# EAGLE board top (EAGLE 7.6.0)
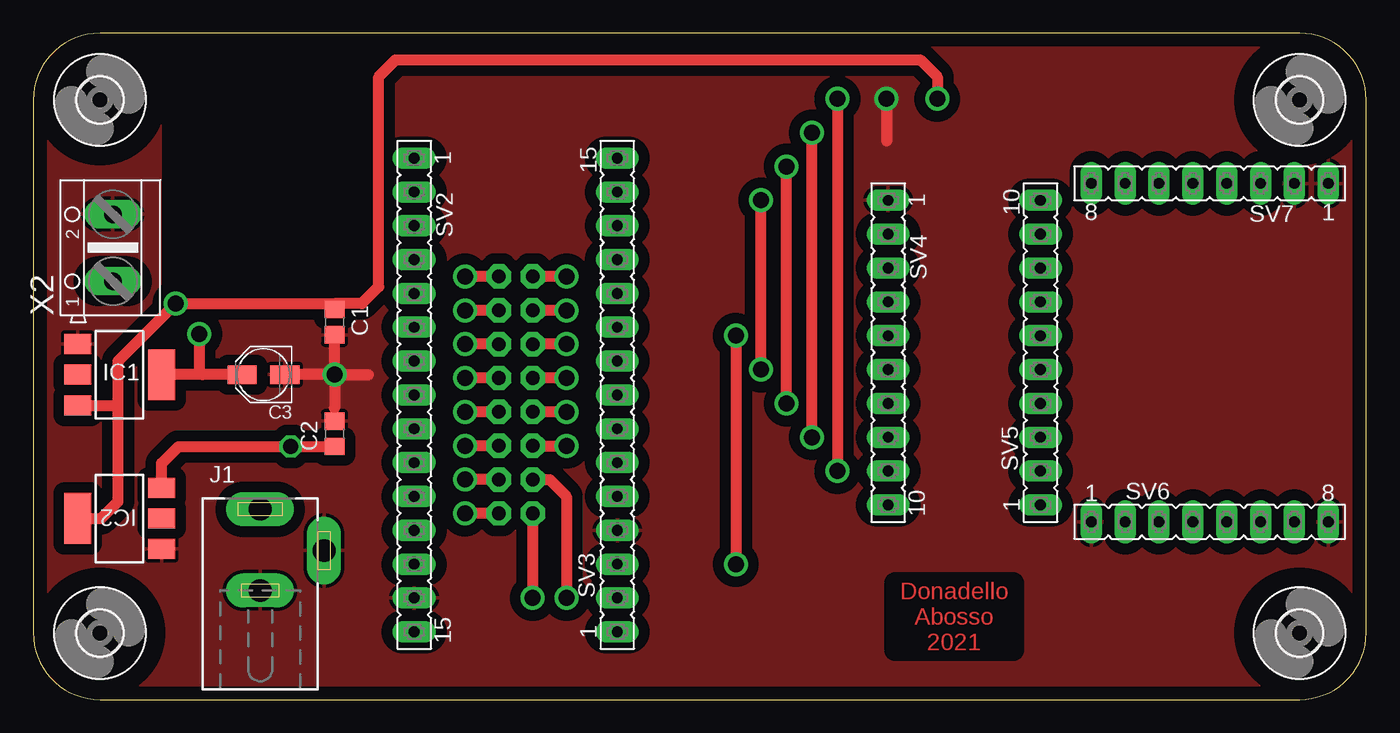
[diagram p0: board, top side]
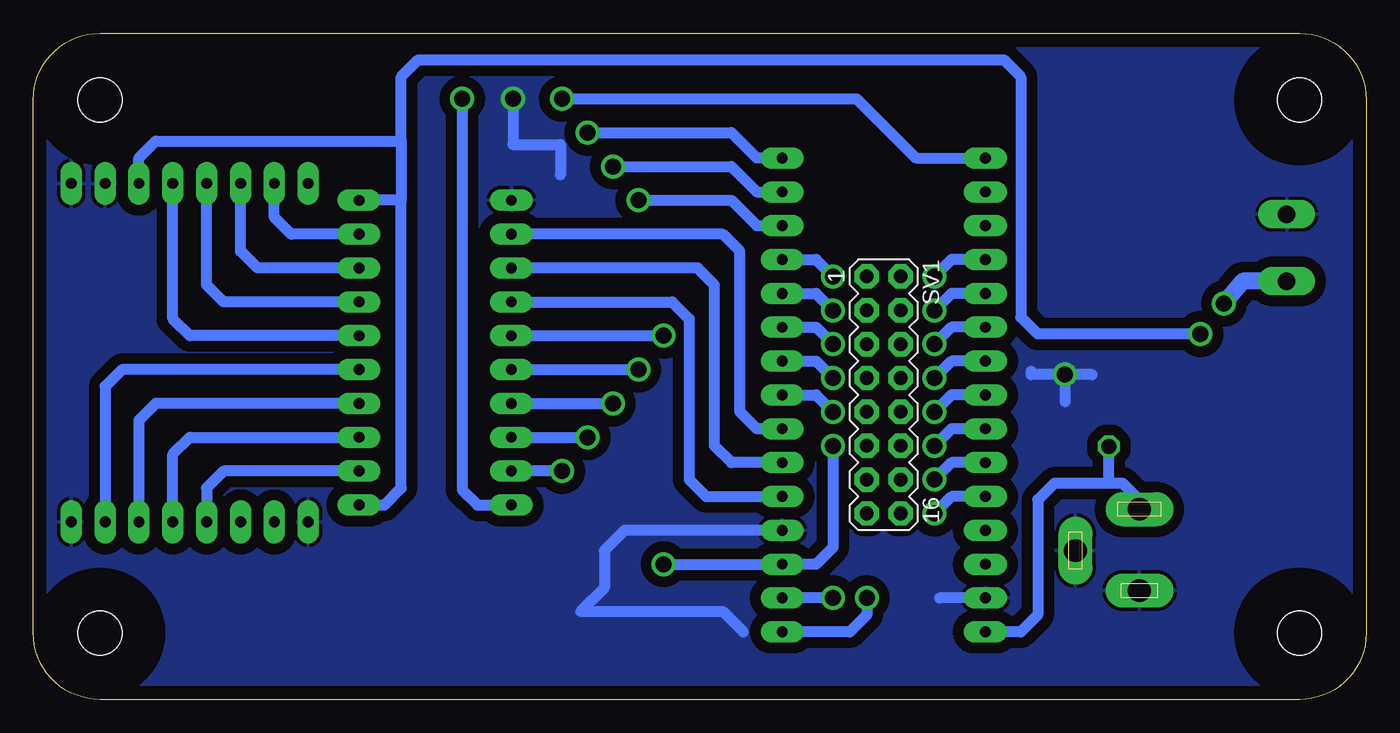
[diagram p1: board, bottom side, seen from below]

Size 100 x 50 mm. Coordinates in mm from the lower left corner, seen from the top.
Outline: 0,45 0,5 arc90 5,0 95,0 arc90 100,5 100,45 arc90 95,50 5,50 arc90 0,45
Copper layers (1*16): Top 0.035mm / dielectric 1.5mm / Bottom 0.035mm
Design rules "default *": minimum track width 6mil, minimum drill 0.35mm, track to track 6mil, track to pad 6mil, pad to pad 6mil, via to via 6mil, smd to smd 6mil, copper to edge 40mil, drill to drill 6mil, minimum pad ring 16mil, minimum via ring 8mil, stop-mask expansion 4mil, vias tented up to drill 0mil, thermal gap 10mil
Net classes: 0 default: width 0.203 mm; 1 vcc: width 0.254 mm

## Footprints (pad centres in the part's own frame; a part is rotated, then mirrored left to right if it is on the bottom)
C0805 = smd 1.3 x 1.5: 1 -0.95,0; 2 0.95,0
PANASONIC_B = smd 2.2 x 1.4: + 1.6,0; - -1.6,0
SOT223 = smd 1.5 x 2: 1 -2.3,-3.15; 2 0,-3.15; 3 2.3,-3.15 | smd 3.8 x 2: 4 0,3.15
DCJ0202 = drill 1.7 pad 2.54 long: 1 0,3.1; 2 4.8,0; 3 0,-3
MA08-2 = drill 1.016 octagon: 1 -8.89,-1.27; 2 -8.89,1.27; 3 -6.35,-1.27; 4 -6.35,1.27; 5 -3.81,-1.27; 6 -3.81,1.27; 7 -1.27,-1.27; 8 -1.27,1.27; 9 1.27,-1.27; 10 1.27,1.27; 11 3.81,-1.27; 12 3.81,1.27; 13 6.35,-1.27; 14 6.35,1.27; 15 8.89,-1.27; 16 8.89,1.27
FE15 = drill 0.813 long: 1 -17.78,0; 2 -15.24,0; 3 -12.7,0; 4 -10.16,0; 5 -7.62,0; 6 -5.08,0; 7 -2.54,0; 8 0,0; 9 2.54,0; 10 5.08,0; 11 7.62,0; 12 10.16,0; 13 12.7,0; 14 15.24,0; 15 17.78,0
FE10 = drill 0.813 long: 1 -11.43,0; 2 -8.89,0; 3 -6.35,0; 4 -3.81,0; 5 -1.27,0; 6 1.27,0; 7 3.81,0; 8 6.35,0; 9 8.89,0; 10 11.43,0
FE08 = drill 0.813 long: 1 -8.89,0; 2 -6.35,0; 3 -3.81,0; 4 -1.27,0; 5 1.27,0; 6 3.81,0; 7 6.35,0; 8 8.89,0
3,3 = hole 3.3: 0,0
AK500/2 = drill 1.321 long: 1 -2.515,0; 2 2.515,0

## Placement (x,y rotation side)
C1  100nF  [C0805]  22.61,28.32 270 top
C2  100nF  [C0805]  22.61,19.94 90 top
C3  10µF  [PANASONIC_B]  17.27,24.38 180 top
IC1  AMS1117-3.3  [SOT223]  6.48,24.38 270 top
IC2  AMS1117-5.0  [SOT223]  6.48,13.59 90 top
J1  DCJ0202  [DCJ0202]  17.02,11.18 0 top
SV1  [MA08-2]  36.2,22.86 270 bottom
SV2  [FE15]  28.57,22.86 270 top
SV3  [FE15]  43.81,22.86 90 top
SV4  [FE10]  64.14,26.04 270 top
SV5  [FE10]  75.56,26.04 90 top
SV6  [FE08]  88.27,13.34 0 top
SV7  [FE08]  88.27,38.73 180 top
U$1  [3,3]  5,5 0 top
U$2  [3,3]  5,45 0 top
U$3  [3,3]  95,45 0 top
U$4  [3,3]  95,5 0 top
X2  [AK500/2]  5.97,33.91 90 top

## Library data of the parts
C1-C3 = rcl
IC1 IC2 = v-reg
J1 = con-jack; OC_FARNELL: unknown; OC_NEWARK: unknown
SV1 = con-lstb; OC_FARNELL: unknown; OC_NEWARK: unknown
SV2-SV7 = con-lsta; OC_FARNELL: unknown; OC_NEWARK: unknown
U$1-U$4 = holes
X2 = con-ptr500; OC_FARNELL: unknown; OC_NEWARK: unknown

## Nets
+3V3: C3.+ IC1.4 SV5.1 SV5.10 SV7.3
+5V: C1.1 IC1.3 IC2.4 SV4.10 X2.1
A0: SV1.2 SV2.4
A1: SV1.4 SV2.5
A2: SV1.6 SV2.6
A3: SV1.8 SV2.7
A4: SV1.10 SV2.8
A5: SV1.12 SV2.9
A6: SV1.14 SV2.10
A7: SV1.16 SV2.11
D2: SV3.5 SV4.4
D3: SV3.6 SV4.3
D4: SV3.7 SV4.2
D5: SV1.9 SV3.8
D6: SV1.7 SV3.9
D7: SV1.5 SV3.10
D8: SV1.3 SV3.11
D9: SV1.1 SV3.12
D10: SV3.13 SV4.6
D11: SV3.14 SV4.7
D12: SV3.15 SV4.8
D13: SV2.1 SV4.9
DIO0: SV5.7 SV7.5
DIO1: SV5.8 SV7.6
DIO2: SV5.9 SV7.7
GND: C1.2 C2.2 C3.- IC1.1 IC2.1 J1.2 J1.3 SV2.14 SV3.4 SV4.1 SV6.1 SV6.8 SV7.1 SV7.2 X2.2
MISO: SV5.3 SV6.5
MOSI: SV5.4 SV6.6
NSS: SV5.5 SV6.7
RESET: SV1.11 SV3.3 SV4.5
RST: SV5.6 SV7.4
RXI: SV1.13 SV3.2
SCK: SV5.2 SV6.4
TXO: SV1.15 SV3.1
VCC: C2.1 IC2.3 J1.1 SV2.15

## Tracks (layer width: path | path; a pad name or v marks a point on that pad's centre or on a via)
+3V3  (via drill 1.2)
  Top 0.406: IC1.4 12.45,24.26
  Top 0.813: C3.+ 12.7,24.38 | 12.7,24.38 IC1.4 | v12.45,27.43 12.45,24.64 12.7,24.38
  Bottom 0.813: SV5.1 73.66,14.61 72.39,15.88 72.39,37.47 | 72.39,37.47 SV5.10 | SV7.3 92.08,40.64 90.81,41.91 72.39,41.91 | 72.39,41.91 72.39,37.47 | v12.45,27.43 24.64,27.43 25.91,28.7 25.91,46.74 27.18,48.01 71.12,48.01 72.39,46.74 72.39,41.91
+5V  (via drill 1.2)
  Top 0.813: 22.61,29.72 v10.67,29.72 6.35,25.4 6.35,21.84 | 22.61,29.72 24.64,29.72 25.91,30.99 25.91,46.74 27.18,48.01 66.55,48.01 67.82,46.74 v67.82,45.09 | 22.61,29.72 C1.1 | IC2.4 5.08,13.59 6.35,14.86 6.35,21.84 | IC1.3 6.11,22.08 6.35,21.84
  Bottom 0.813: v67.82,45.09 67.82,15.75 66.67,14.61 SV4.10
  Bottom 1.27: X2.1 9.25,31.39 v10.67,29.72
A0  (via drill 1.2)
  Top 0.813: SV1.2 v32.38,31.75
  Bottom 0.813: SV2.4 31.11,33.02 v32.38,31.75
A1  (via drill 1.2)
  Top 0.813: SV1.4 v32.38,29.21
  Bottom 0.813: SV2.5 31.11,30.48 v32.38,29.21
A2  (via drill 1.2)
  Top 0.813: SV1.6 v32.38,26.67
  Bottom 0.813: SV2.6 31.11,27.94 v32.38,26.67
A3  (via drill 1.2)
  Top 0.813: SV1.8 v32.38,24.13
  Bottom 0.813: SV2.7 31.11,25.4 v32.38,24.13
A4  (via drill 1.2)
  Top 0.813: SV1.10 v32.38,21.59
  Bottom 0.813: SV2.8 31.11,22.86 v32.38,21.59
A5  (via drill 1.2)
  Top 0.813: SV1.12 v32.38,19.05
  Bottom 0.813: SV2.9 31.11,20.32 v32.38,19.05
A6  (via drill 1.2)
  Top 0.813: SV1.14 v32.38,16.51
  Bottom 0.813: SV2.10 31.11,17.78 v32.38,16.51
A7  (via drill 1.2)
  Top 0.813: SV1.16 v32.38,13.97
  Bottom 0.813: SV2.11 31.11,15.24 v32.38,13.97
D2
  Bottom 0.813: SV4.4 52.07,29.84 50.8,28.57 50.8,16.51 49.53,15.24 SV3.5
D3
  Bottom 0.813: SV3.6 47.62,17.78 48.9,19.05 48.9,31.11 50.16,32.38 SV4.3
D4
  Bottom 0.813: SV3.7 45.72,20.32 46.99,21.59 46.99,33.66 48.26,34.92 SV4.2
D5  (via drill 1.2)
  Top 0.813: v40.01,21.59 SV1.9
  Bottom 0.813: SV3.8 41.27,22.86 v40.01,21.59
D6  (via drill 1.2)
  Top 0.813: v40.01,24.13 SV1.7
  Bottom 0.813: SV3.9 41.27,25.4 v40.01,24.13
D7  (via drill 1.2)
  Top 0.813: v40.01,26.67 SV1.5
  Bottom 0.813: SV3.10 41.27,27.94 v40.01,26.67
D8  (via drill 1.2)
  Top 0.813: v40.01,29.21 SV1.3
  Bottom 0.813: SV3.11 41.27,30.48 v40.01,29.21
D9  (via drill 1.2)
  Top 0.813: v40.01,31.75 SV1.1
  Bottom 0.813: SV3.12 41.27,33.02 v40.01,31.75
D10  (via drill 1.2)
  Top 0.813: v54.61,24.77 v54.61,37.47
  Bottom 0.813: SV4.6 v54.61,24.77 | SV3.13 45.72,35.56 47.62,37.47 v54.61,37.47
D11  (via drill 1.2)
  Top 0.813: v56.52,22.23 v56.52,40.01
  Bottom 0.813: SV4.7 v56.52,22.23 | SV3.14 45.72,38.1 47.62,40.01 v56.52,40.01
D12  (via drill 1.2)
  Top 0.813: v58.42,19.68 v58.42,42.55
  Bottom 0.813: SV4.8 v58.42,19.68 | SV3.15 45.72,40.64 47.62,42.55 v58.42,42.55
D13  (via drill 1.2)
  Top 0.813: v60.33,45.09 v60.33,17.14
  Bottom 0.813: v60.33,17.14 SV4.9 | SV2.1 33.78,40.64 38.23,45.09 v60.33,45.09
DIO0
  Bottom 0.813: SV5.7 85.72,29.84 87,31.11 SV7.5
DIO1
  Bottom 0.813: SV5.8 83.19,32.38 84.45,33.66 SV7.6
DIO2
  Bottom 0.813: SV5.9 80.64,34.92 81.92,36.2 SV7.7
GND  (via drill 1.2)
  Top 0.813: v64.01,45.09 64.01,41.91 | v22.61,24.38 22.61,21.84 | v22.61,24.38 22.61,27.18 | v22.61,24.38 25.15,24.38 | v22.61,24.38 19.81,24.38
  Bottom 0.813: SV2.14 32,7.62 | SV3.4 55.63,12.7 57.15,11.18 57.15,8.38 58.93,6.6 48.26,6.6 46.74,5.08 | v22.61,24.38 22.61,22.35 | 20.57,24.38 25.15,24.38 25.15,24.64 | v64.01,45.09 64.01,41.66 60.45,41.66 60.45,39.37
  pour Bottom (isolate 0.813, rank 6): -0.64,50.16 100.84,50.93 100.84,-0.25 -0.89,-0.64
  pour Top (isolate 0.813, rank 6): -0.38,50.16 100.84,50.93 100.58,-0.51 -1.14,-0.89
MISO
  Bottom 0.813: SV6.5 89.53,18.41 88.27,19.68 SV5.3
MOSI
  Bottom 0.813: SV5.4 90.81,22.23 92.08,20.95 SV6.6
N$1
  pour Bottom (isolate 0.813): 21.84,25.15 21.84,23.62 23.37,23.62 23.37,25.15
  pour Bottom (isolate 0.813): 62.99,45.97 62.99,44.2 65.02,44.2 65.02,45.97
  pour Top (isolate 0.813): 21.84,25.15 21.84,23.62 23.37,23.62 23.37,25.15
  pour Top (isolate 0.813): 62.99,45.97 62.99,44.2 65.02,44.2 65.02,45.97
N$2
  cutout Top: 9.65,49.02 9.65,30.99 24.64,30.99 24.64,49.02
NSS
  Bottom 0.813: SV5.5 93.34,24.77 94.61,23.5 SV6.7
RESET  (via drill 1.2)
  Top 0.813: SV1.11 v40.01,19.05 | v52.7,27.3 v52.7,10.16
  Bottom 0.813: v40.01,19.05 40.01,11.43 41.27,10.16 SV3.3 v52.7,10.16 | SV4.5 v52.7,27.3
RST
  Bottom 0.813: SV5.6 88.27,27.3 89.53,28.57 SV7.4
RXI  (via drill 1.2)
  Top 0.813: SV1.13 38.73,16.51 40.01,15.24 v40.01,7.62
  Bottom 0.813: v40.01,7.62 SV3.2
SCK
  Bottom 0.813: SV5.2 85.72,17.14 87,15.88 SV6.4
TXO  (via drill 1.2)
  Top 0.813: SV1.15 v37.47,7.62
  Bottom 0.813: v37.47,7.62 37.47,6.35 38.73,5.08 SV3.1
VCC  (via drill 1.1)
  Top 0.813: IC2.3 9.63,17.72 10.9,18.99 v19.3,18.99 C2.1
  Bottom 0.813: SV2.15 25.91,5.08 24.64,6.35 24.64,14.99 23.37,16.26 19.3,16.26 | 19.3,16.26 v19.3,18.99 | 19.3,16.26 18.29,16.26 17.02,14.99 J1.1

## Text on the board
Top: Donadello / Abosso / 2021
tValues: (-) | (+)